# Altium PCB PCB1.PcbDoc (part 3 of 7)
Units mm, origin at the board's own origin, x right, y up, seen from the top; angles counter-clockwise.
Board outline 168 x 107.92 mm, 4 copper layers (Top Layer, POWER_LAYER, GND_LAYER, Bottom Layer), stack 1.182 mm thick; 507 components, 566 nets, 2495 pads, 1244 vias.
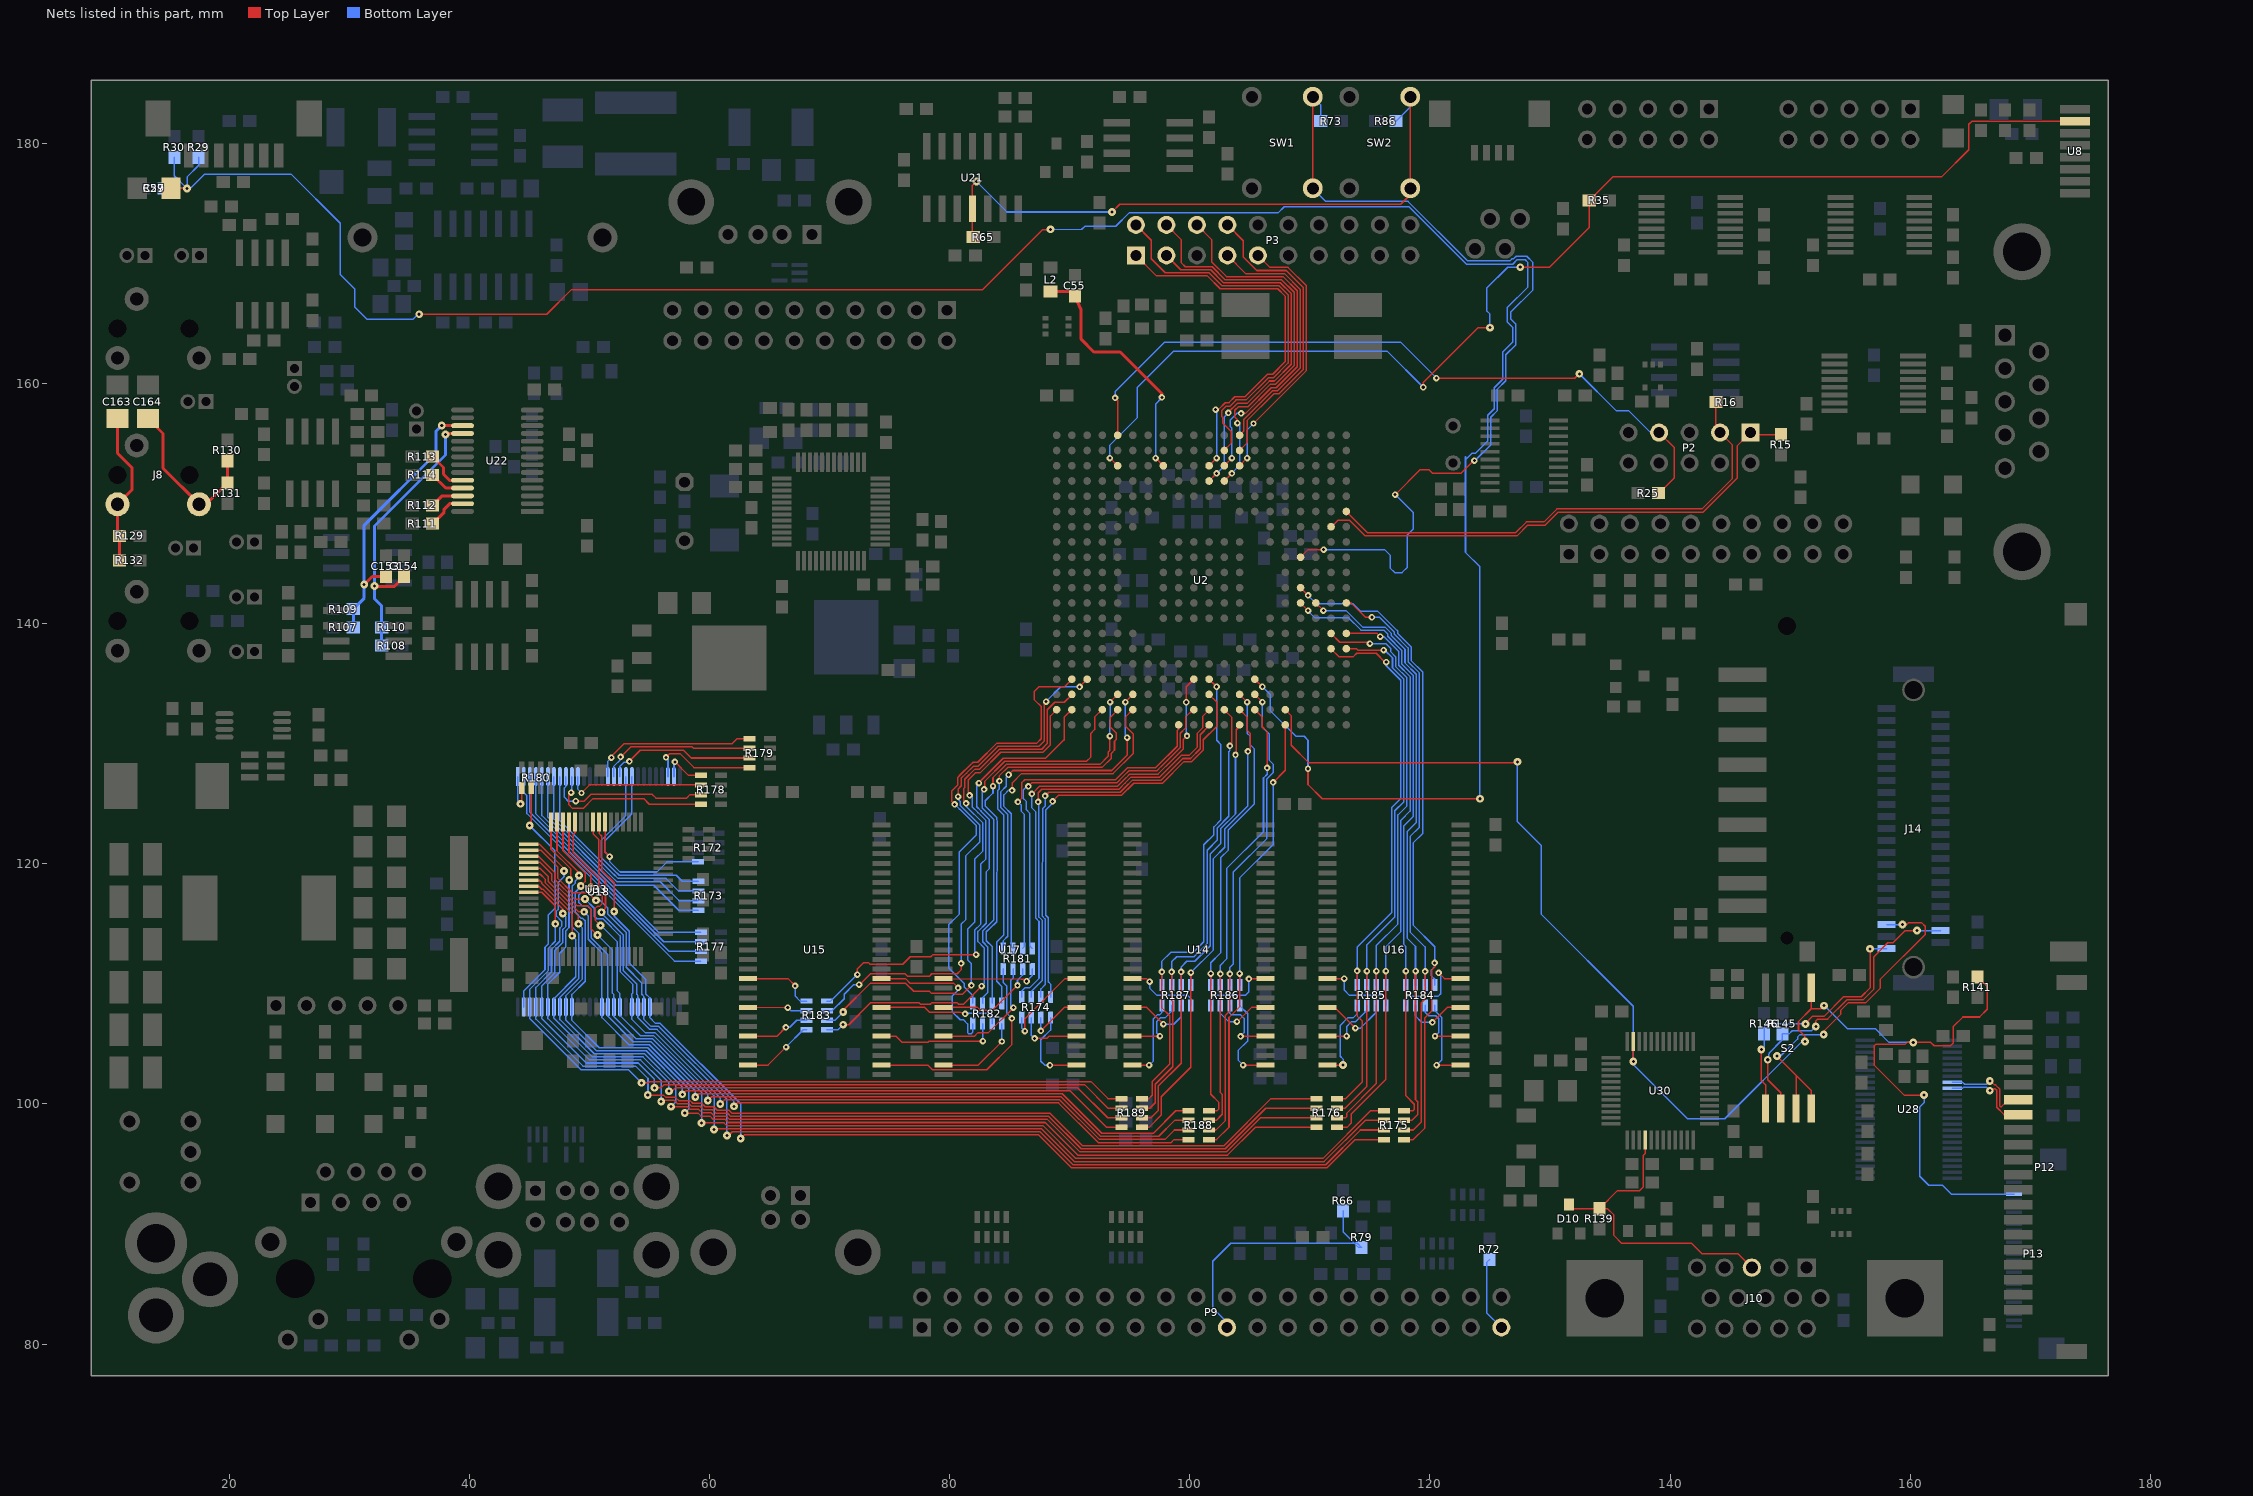
[diagram p5: the nets of this part, all layers, seen from the top]

## Via types
v1: diameter 0.54, hole 0.254, Top Layer to Bottom Layer, tented both sides, 504 vias
v2: diameter 0.65, hole 0.254, Top Layer to Bottom Layer, 387 vias
v3: diameter 0.65, hole 0.254, Top Layer to Bottom Layer, tented both sides, 325 vias
v4: diameter 0.54, hole 0.254, Top Layer to Bottom Layer, 25 vias
v5: diameter 1.27, hole 0.75, Top Layer to Bottom Layer, 2 vias
v6: diameter 0.65, hole 0.254, Top Layer to Bottom Layer, tented bottom, 1 vias

## Nets (pads, with @x,y where several pads share a name; then routed paths per layer and width w, separated by ;. In a path a pad name is that pad's centre, name@x,y a point inside that pad or via, vN(x,y) a via of type N, cw(c..) or ccw(c..) an arc to the next point about the centre after c; other vN are vias at no path point) (continued)
AA7: R172.5 U18.20 U33.39 | length 19.3
  Top Layer w0.127: U33.39@51.28,123.487 51.28,122.112 51.262,122.094 51.262,121.001 v1(51.662,120.601)
  Bottom Layer w0.127: U18.20@53.526,127.273 53.526,124.165 51.262,121.901 51.262,121.001 v1(51.662,120.601) 51.662,120.194 52.536,119.32 55.6,119.32 56.44,120.16 R172.5@59.04,120.16
AA8: R173.8 U18.19 | length 16.5
  Bottom Layer w0.127: 52.044,119.453 50.982,120.515 50.982,121.98 53.026,124.024 U18.19@53.026,127.273 ; 52.044,119.453 52.457,119.04 57.22,119.04 57.72,118.54 R173.8@59.06,118.54
AA9: R173.7 U18.8 | length 17.6
  Bottom Layer w0.127: U18.8@47.526,127.273 47.526,123.594 51.988,119.132 52.006,119.132 52.358,118.78 56.36,118.78 57.4,117.74 R173.7@59.06,117.74
AA10: R173.6 U18.7 | length 18.4
  Bottom Layer w0.127: U18.7@47.026,127.273 47.026,123.735 52.146,118.614 52.164,118.614 52.278,118.5 55.88,118.5 57.44,116.94 R173.6@59.06,116.94
AA11: R173.5 U18.6 | length 19.1
  Bottom Layer w0.127: U18.6@46.526,127.273 46.526,123.876 52.182,118.22 55.34,118.22 57.42,116.14 R173.5@59.06,116.14
AA12: R177.8 U18.5 | length 20.5
  Bottom Layer w0.127: U18.5@46.026,127.273 46.026,124.017 55.362,114.68 ; 55.362,114.68 55.742,114.3 R177.8@59.26,114.3
AA13: R177.7 U18.4 | length 21.3
  Bottom Layer w0.127: U18.4@45.526,127.273 45.526,124.157 55.002,114.68 ; 55.002,114.68 56.182,113.5 R177.7@59.26,113.5
AA14: R177.6 U18.3 | length 22
  Bottom Layer w0.127: U18.3@45.026,127.273 45.026,124.297 56.622,112.7 R177.6@59.26,112.7
AA15: R177.5 U18.2 | length 22.8
  Bottom Layer w0.127: U18.2@44.526,127.273 44.526,125.914 44.772,125.668 44.772,124.191 57.062,111.9 R177.5@59.26,111.9
AA16: R180.5 U18.1 | length 3.7
  Top Layer w0.127: v3(44.242,125.001) 44.336,125.095 R180.5@44.336,126.316
  Bottom Layer w0.127: U18.1@44.026,127.273 44.026,125.217 v3(44.242,125.001)
AA17: R180.6 U18.55 | length 20.3
  Top Layer w0.127: v3(45.002,123.181) 45.136,123.315 R180.6@45.136,126.316 ; 45.12,125.12 45.136,125.136
  Bottom Layer w0.127: U18.55@44.526,108.073 44.526,109.424 46.28,111.178 46.28,113.049 46.542,113.31 46.542,115.729 47.142,116.329 47.142,118.278 47.102,118.318 47.102,121.081 v3(45.002,123.181)
AA18: R179.7 U18.18 | length 12.5
  Top Layer w0.127: v1(53.302,128.541) 54.221,129.46 57.82,129.46 58.464,128.816 R179.7@63.324,128.816
  Bottom Layer w0.127: U18.18@52.526,127.273 52.526,128.126 52.881,128.481 53.242,128.481 v1(53.302,128.541)
AA19: R179.6 U18.17 | length 13
  Top Layer w0.127: v1(52.582,128.901) 53.421,129.74 58.54,129.74 58.664,129.616 R179.6@63.324,129.616
  Bottom Layer w0.127: U18.17@52.026,127.273 52.026,128.146 52.582,128.702 v1(52.582,128.901)
AA20: R179.5 U18.16 | length 13.9
  Top Layer w0.127: v1(51.802,128.841) 51.802,128.942 52.86,130 61.864,130 62.28,130.416 R179.5@63.324,130.416
  Bottom Layer w0.127: U18.16@51.526,127.273 51.526,128.565 v1(51.802,128.841)
AA21: R178.6 U18.11 | length 11.7
  Top Layer w0.127: v1(49.32,125.9) 49.988,126.568 R178.6@59.26,126.568
  Bottom Layer w0.127: U18.11@49.026,127.273 49.026,126.194 v1(49.32,125.9)
AA22: R178.8 U18.10 | length 14.1
  Top Layer w0.127: v1(48.46,125.94) 48.26,125.74 48.26,124.94 48.58,124.62 49.46,124.62 50.28,125.44 54.5,125.44 54.972,124.968 R178.8@59.26,124.968
  Bottom Layer w0.127: v1(48.46,125.94) 48.526,126.006 U18.10@48.526,127.273
AA23: R178.7 U18.9 | length 13.8
  Top Layer w0.127: v1(48.84,125.22) 49.54,125.22 50.1,125.78 55.22,125.78 55.52,125.48 58.08,125.48 58.368,125.768 R178.7@59.26,125.768
  Bottom Layer w0.127: U18.9@48.026,127.273 48.026,126.446 47.9,126.32 47.9,125.54 48.22,125.22 v1(48.84,125.22)
AA24: R179.8 U18.26 | length 9.2
  Top Layer w0.127: v1(56.36,128.86) 56.68,129.18 57.52,129.18 58.684,128.016 R179.8@63.324,128.016
  Bottom Layer w0.127: v1(56.36,128.86) 56.526,128.694 U18.26@56.526,127.273
AA25: R178.5 U18.27 | length 3.9
  Top Layer w0.127: v1(57.1,128.5) 58.232,127.368 R178.5@59.26,127.368
  Bottom Layer w0.127: U18.27@57.026,127.273 57.026,128.426 v1(57.1,128.5)
ADC_VDD: C55.2 L2.2 U2.H18 | length 21
  Top Layer w0.127: C55.2@90.066,167.656 C55.2@90.424,167.298 ; v1(97.15,153.8) 97.152,153.8 U2.H18@97.79,153.162
  Top Layer w0.2: v4(97.66,158.86) 97.66,159.18
  Top Layer w0.25: L2.2@88.392,167.656 C55.2@90.066,167.656 ; C55.2@90.424,167.298 90.94,166.16 90.94,163.7 91.996,162.644 94.196,162.644 97.66,159.18
  Bottom Layer w0.127: v1(97.15,153.8) 97.15,158.31 97.66,158.82 v4(97.66,158.86)
AINA: C153.2 R107.1 R109.1 U22.17 | length 23.7
  Top Layer w0.25: v2(31.22,143.26) 31.89,143.93 C153.2@33.02,143.93 ; v2(37.68,156.52) 37.698,156.502 U22.17@39.412,156.502
  Bottom Layer w0.25: R107.1@30.314,139.7 R109.1@30.314,141.224 31.22,142.13 31.22,148.2 37.2,154.18 37.2,156.04 v2(37.68,156.52)
AINB: C154.1 R108.1 R110.1 U22.18 | length 24.6
  Top Layer w0.25: v2(32.08,143.14) 32.08,143.12 33.734,143.12 C154.1@34.544,143.93 ; v2(38,155.76) 38.092,155.852 U22.18@39.412,155.852
  Bottom Layer w0.25: R108.1@32.678,138.176 32.678,141.482 32.08,142.08 32.08,148.14 38,154.06 v2(38,155.76)
AOUTA+: R114.2 U22.25 | length 2.9
  Top Layer w0.25: R114.2@36.918,152.4 38.016,151.302 U22.25@39.412,151.302
AOUTA-: R113.2 U22.24 | length 3.6
  Top Layer w0.25: R113.2@36.918,153.924 37.82,153.022 37.82,152.46 38.328,151.952 U22.24@39.412,151.952
AOUTB+: R112.2 U22.26 | length 2.8
  Top Layer w0.25: R112.2@36.918,149.86 37.71,150.652 U22.26@39.412,150.652
AOUTB-: R111.2 U22.27 | length 3.3
  Top Layer w0.25: R111.2@36.918,148.336 37.88,149.298 37.88,149.54 38.342,150.002 U22.27@39.412,150.002
BLANK: P13.3 R141.1 S2.1 U2.T2 U30.11 | length 124.3
  Top Layer w0.127: U2.T2@107.95,132.842 107.95,132.83 108.46,132.32 108.46,129.84 108.48,129.84 109.887,128.433 121.02,128.42 127.2,128.42 v3(127.28,128.5) ; v2(136.942,103.542) U30.11@136.942,105.192 ; v3(151.24,105.2) 151.24,105.64 150.7,106.18 150.7,106.86 151.765,107.925 ; S2.1@151.765,109.673 151.765,107.925 ; v3(152.82,108.18) 152.565,107.925 151.765,107.925 ; v3(161.16,100.74) 159.5,100.74 157,103.24 157,104.82 157.14,104.96 159.58,104.96 159.74,105.12 161.72,105.12 162,104.84 163.36,104.84 163.6,105.08 163.6,106.44 164.4,107.24 165.78,107.24 166.42,107.88 166.42,109.766 R141.1@165.608,110.578
  Bottom Layer w0.127: v3(127.28,128.5) 127.28,123.528 129.254,121.554 129.254,115.826 136.942,108.138 136.942,103.278 141.46,98.76 144.56,98.76 151,105.2 v3(151.24,105.2) ; v3@152.86,108.18 154.786,106.254 157.106,106.254 158.24,105.12 v3(160.26,105.12) ; v3(161.16,100.74) 161.16,100.1 160.794,99.734 160.794,93.98 161.553,93.221 162.699,93.221 163.448,92.472 P13.3@168.656,92.472
BLUE: D10.3 J10.3 R139.2 U30.28 | length 26.8
  Top Layer w0.127: D10.3@131.572,91.624 131.922,91.274 134.786,91.274 135.32,90.74 135.32,89.04 135.96,88.4 141.78,88.4 142.66,87.52 145.652,87.52 J10.3@146.812,86.36 ; R139.2@134.112,91.274 135.618,92.78 137.471,92.78 137.559,92.868 137.568,92.868 137.757,93.057 137.757,95.677 137.942,95.862 U30.28@137.942,96.992
BOOT0: R73.2 SW1.1 SW1.4 U2.U12 | length 75.8
  Top Layer w0.127: U2.U12@109.22,145.542 109.22,145.55 109.85,146.18 v1(111.14,146.18) ; SW1.4@110.236,176.276 SW1.1@110.236,183.896 ; v1(117.1,150.76) 117.12,150.76 119.2,152.84 119.9,152.84 120.2,152.54 122.581,152.54 123.621,153.58 v1(123.7,153.58)
  Bottom Layer w0.127: SW1.4@110.236,176.276 111.327,175.185 118.175,175.185 123.14,170.22 126.663,170.22 126.863,170.42 126.98,170.42 127.18,170.62 128.06,170.62 128.58,170.1 128.58,167.8 126.72,165.94 126.72,165.4 127.14,164.98 127.14,163.22 126.32,162.4 126.32,160.24 125.625,159.545 125.625,157.765 125.06,157.2 125.06,154.9 123.74,153.58 v1(123.7,153.58) ; SW1.1@110.236,183.896 110.91,183.222 R73.2@110.91,181.864 ; v1(111.14,146.18) 116.22,146.18 116.68,145.72 116.68,144.64 117.06,144.26 117.68,144.26 118.12,144.7 118.12,147.42 118.62,147.92 118.62,149.24 v1(117.1,150.76)
BRIGHT: C59.2 R27.1 R29.2 R30.2 U2.P4 | length 209.9
  Top Layer w0.127: C59.2@15.116,176.276 16.444,176.276 v3(16.46,176.26) ; v3(35.8,165.78) 46.42,165.78 48.48,167.84 82.751,167.84 87.751,172.84 v3@88.36,172.84 ; U2.P4@105.41,135.382 106.04,134.752 v1(106.04,134.75) ; v1(109.84,127.92) 109.84,126.6 111.02,125.42 v3(124.16,125.42)
  Bottom Layer w0.127: R27.1@14.566,176.276 16.756,176.276 17.94,177.46 25.12,177.46 29.22,173.36 29.22,169.1 30.42,167.9 30.42,166.4 31.44,165.38 35.3,165.38 35.7,165.78 v3(35.8,165.78) ; R30.2@15.4,178.862 15.4,177.32 v3(16.46,176.26) 16.46,177.22 17.432,178.192 R29.2@17.432,178.862 ; v3@88.36,172.84 88.38,172.84 91,172.86 91.26,173.12 93.831,173.12 94.931,174.22 107.34,174.22 107.86,174.74 118.26,174.74 123.046,169.954 126.894,169.954 127.26,170.32 127.94,170.32 128.16,170.1 128.16,168.06 126.42,166.32 126.42,165.16 126.886,164.694 126.886,163.446 126.066,162.626 126.066,160.367 125.36,159.661 125.36,157.916 124.806,157.362 124.806,155.226 123.766,154.186 123.486,154.186 122.96,153.66 ; v1(106.04,134.75) 106.05,134.75 106.68,134.12 106.68,132.78 108.84,130.62 109.52,130.62 109.84,130.3 v1(109.84,127.92) ; 122.96,153.92 122.96,145.94 124.16,144.74 v3(124.16,125.42)
  other v3: 88.38,172.86
CLK0M: P12.14 U28.33 | length 7.4
  Top Layer w0.127: v3(166.64,101.1) 166.82,101.1 166.98,101.26 167.08,101.26 167.206,101.134 167.206,99.714 167.81,99.11 P12.14@169.013,99.11
  Bottom Layer w0.127: U28.33@163.504,101.31 164.37,101.31 164.44,101.38 166.36,101.38 v3(166.64,101.1)
CLK0P: P12.15 U28.32 | length 7.7
  Top Layer w0.127: v3(166.64,101.92) 166.68,101.92 167.02,101.58 167.12,101.58 167.46,101.24 167.46,99.819 167.499,99.78 167.62,99.78 167.878,100.038 168.2,100.36 P12.15@169.013,100.36
  Bottom Layer w0.127: U28.32@163.504,101.81 164.37,101.81 164.54,101.64 166.36,101.64 v3(166.64,101.92)
COL0: P3.9 U2.N18 | length 22.4
  Top Layer w0.127: U2.N18@104.14,153.162 104.14,153.17 v1(104.77,153.8) ; v1(105.3,156.68) 109.708,161.087 109.708,168.152 108.18,169.68 106.672,169.68 P3.9@105.664,170.688
  Bottom Layer w0.127: v1(104.77,153.8) 104.77,156.15 v1(105.3,156.68)
COL1: P3.8 U2.N19 | length 25.3
  Top Layer w0.127: P3.8@103.124,173.228 104.44,171.912 104.44,170.56 105.574,169.426 108.02,169.426 109.454,167.992 109.454,161.192 107.402,159.14 106.98,159.14 104.76,156.92 104.76,155.06 104.14,154.44 U2.N19@104.14,154.432
COL2: P3.7 U2.N20 | length 21.7
  Top Layer w0.127: P3.7@103.124,170.688 104.64,169.172 107.88,169.172 109.2,167.852 109.2,161.297 107.307,159.404 106.884,159.404 104.506,157.026 104.506,156.086 104.14,155.72 U2.N20@104.14,155.702
COL3: P3.6 U2.M18 | length 29.6
  Top Layer w0.127: P3.6@100.584,173.228 101.84,171.972 101.84,170.12 103.042,168.918 107.76,168.918 108.946,167.732 108.946,161.402 107.204,159.66 106.781,159.66 104.641,157.52 v1(104.26,157.52) ; U2.M18@102.87,153.162 102.87,153.17 v1(103.5,153.8)
  Bottom Layer w0.127: v1(103.5,153.8) 103.5,156.28 103.36,156.42 103.36,156.98 103.9,157.52 v1(104.26,157.52)
COL4: P3.4 U2.M17 | length 33.3
  Top Layer w0.127: P3.4@98.044,173.228 99.3,171.972 99.3,170.06 99.621,169.739 101.861,169.739 102.936,168.664 107.64,168.664 108.692,167.612 108.692,161.508 107.149,159.965 106.727,159.965 104.842,158.08 104.04,158.08 103.74,157.78 103.74,157.22 103.96,157 v1(103.96,156.72) ; U2.M17@102.87,151.892 102.87,151.9 v1(103.5,152.53)
  Bottom Layer w0.127: v1(103.5,152.53) 103.5,152.56 104.16,153.22 104.16,156.56 v1(103.96,156.72)
COL5: P3.3 U2.L17 | length 30.9
  Top Layer w0.127: P3.3@98.044,170.688 99.247,169.485 101.734,169.485 102.809,168.41 107.534,168.41 108.438,167.506 108.438,161.613 107.045,160.22 106.622,160.22 104.76,158.358 103.938,158.358 103.2,157.62 v1(103.2,157.56) ; U2.L17@101.6,151.892 101.6,151.9 v1(102.23,152.53)
  Bottom Layer w0.127: v1(102.23,152.53) 102.25,152.53 102.88,153.16 102.88,157.24 v1(103.2,157.56)
COL6: P3.2 U2.M19 | length 32.7
  Top Layer w0.127: P3.2@95.504,173.228 96.78,171.952 96.78,170.4 97.949,169.231 101.594,169.231 102.669,168.156 107.429,168.156 108.184,167.401 108.184,161.718 106.943,160.477 106.52,160.477 104.683,158.64 103.841,158.64 ; U2.M19@102.87,154.432 102.87,154.47 103.46,155.06 103.46,156 102.74,156.72 102.74,157.18 102.66,157.26 102.66,157.76 103.02,158.12 103.341,158.12 103.841,158.62
COL7: P3.1 U2.L18 | length 31.7
  Top Layer w0.127: P3.1@95.504,170.688 97.215,168.977 101.463,168.977 102.538,167.902 107.324,167.902 107.93,167.296 107.93,161.823 106.895,160.788 106.472,160.788 104.59,158.906 103.74,158.906 103.264,158.43 103.264,158.41 102.951,158.41 102.381,157.84 v1(102.14,157.84) ; U2.L18@101.6,153.162 101.6,153.17 v1(102.23,153.8)
  Bottom Layer w0.127: v1(102.14,157.84) 102.23,157.75 v1(102.23,153.8)
D0: R175.1 R184.8 U2.U10 | length 57.4
  Top Layer w0.127: U2.U10@109.22,143.002 v1@109.85,142.372 ; R175.1@117.856,97.028 118.608,97.028 119.58,98 119.58,107.18 120.14,107.74 120.14,111.16 120.396,111.416 v1(120.396,111.74)
  Bottom Layer w0.127: v1@109.85,142.35 110.54,141.66 113.6,141.66 114.2,141.06 115.64,141.06 117.26,139.44 117.3,139.399 117.3,139.217 118.431,138.086 118.431,136.943 119.38,135.994 119.38,122.51 118.598,121.728 118.598,114.898 120.396,113.1 120.396,111.44 120.12,111.164 120.12,110.66 120.396,110.384 R184.8@120.396,109.904
  other v1: 109.85,142.37
D1: R175.2 R184.7 U2.Y9 | length 50.5
  Top Layer w0.127: U2.Y9@113.03,141.732 113.428,141.732 114.62,140.54 v1(115.16,140.54) ; R175.2@117.856,97.828 118.608,97.828 119.26,98.48 119.26,108.38 119.596,108.716 v1(119.596,111.04)
  Bottom Layer w0.127: v1(115.16,140.54) 115.8,140.54 117.02,139.32 117.02,139.138 118.177,137.98 118.177,136.838 119.12,135.895 119.12,123.05 118.344,122.274 118.344,114.332 119.596,113.08 R184.7@119.596,109.904
D2: R175.3 R184.6 U2.V9 | length 51.5
  Top Layer w0.127: U2.V9@110.49,141.732 111.12,141.102 v1(111.12,141.1) ; R175.3@117.856,98.628 118.488,98.628 118.98,99.12 118.98,100.18 118.796,100.364 v1(118.796,111.06)
  Bottom Layer w0.127: v1(111.12,141.1) 113.013,141.1 114.386,139.727 116.253,139.727 116.76,139.22 116.76,139.038 117.92,137.878 117.92,136.736 118.86,135.796 118.86,123.444 118.09,122.674 118.09,113.826 118.796,113.12 R184.6@118.796,109.904
D3: R175.4 R184.5 U2.U9 | length 51.6
  Top Layer w0.127: U2.U9@109.22,141.732 109.85,141.102 v1(109.85,141.1) ; R175.4@117.856,99.428 118.588,99.428 118.7,99.54 118.7,99.98 117.996,100.684 v1(117.996,111.06)
  Bottom Layer w0.127: v1(109.85,141.1) 109.85,141.05 110.42,140.48 113.24,140.48 114.247,139.473 116.147,139.473 116.48,139.14 116.48,138.959 117.658,137.781 117.658,136.639 118.6,135.697 118.6,123.938 117.836,123.174 117.836,113.26 117.996,113.1 R184.5@117.996,109.904
D4: R176.1 R185.8 U2.Y7 | length 49.2
  Top Layer w0.127: R176.1@112.268,98.044 113.084,98.044 113.44,98.4 113.44,99.16 116.332,102.052 v1(116.332,111.06) ; U2.Y7@113.03,139.192 115.588,139.192 v1(115.86,138.92)
  Bottom Layer w0.127: v1(115.86,138.92) 116.16,138.92 117.4,137.68 117.4,136.538 118.34,135.598 118.34,124.392 117.582,123.634 117.582,114.362 116.332,113.112 R185.8@116.332,109.904
D5: R176.2 R185.7 U2.W7 | length 49.1
  Top Layer w0.127: U2.W7@111.772,139.192 U2.W7@111.76,139.192 111.76,139.18 112.48,138.46 114.88,138.46 v1(115,138.34) ; R176.2@112.268,98.844 112.964,98.844 113.08,98.96 113.08,99.24 115.532,101.692 v1(115.532,111.06)
  Bottom Layer w0.127: v1(115,138.34) 116.34,138.34 116.72,137.96 116.72,137.679 117.14,137.259 117.14,136.438 118.08,135.498 118.08,124.826 117.328,124.074 117.328,114.988 115.532,113.192 R185.7@115.532,109.904
D6: R176.3 R185.6 U2.Y6 | length 45.9
  Top Layer w0.127: R176.3@112.268,99.644 112.924,99.644 114.74,101.46 v1(114.74,111.06) ; U2.Y6@113.03,137.922 113.878,137.922 114.006,137.794 116.134,137.794 v1(116.14,137.8)
  Bottom Layer w0.127: R185.6@114.732,109.904 114.732,113.232 117.074,115.574 117.074,124.414 117.82,125.16 117.82,135.399 116.88,136.339 116.88,137.16 116.24,137.8 v1(116.14,137.8)
D7: R176.4 R185.5 U2.W6 | length 46.3
  Top Layer w0.127: U2.W6@111.762,137.922 U2.W6@111.76,137.922 111.76,137.9 112.4,137.26 113.62,137.26 113.9,137.54 115.52,137.54 116.26,136.8 v1(116.36,136.8) ; R176.4@112.268,100.444 112.984,100.444 114.34,101.8 114.34,106.92 113.932,107.328 v1(113.932,111.08)
  Bottom Layer w0.127: R185.5@113.932,109.904 113.932,113.052 116.82,115.94 116.82,124.7 117.56,125.44 117.56,135.3 116.36,136.5 v1(116.36,136.8)
D8: R186.8 R188.1 U2.T1 | length 38.5
  Top Layer w0.127: R188.1@101.6,97.028 102.228,97.028 103.26,98.06 103.26,107.2 104.14,108.08 v1(104.14,110.86) ; v1(106.94,126.78) 107.95,127.79 U2.T1@107.95,131.572
  Bottom Layer w0.127: R186.8@104.14,109.904 104.14,118.82 106.94,121.62 v1(106.94,126.78)
D9: R186.7 R188.2 U2.P3 | length 40.4
  Top Layer w0.127: R188.2@101.6,97.828 102.168,97.828 102.96,98.62 102.96,107.38 103.34,107.76 v1(103.34,110.84) ; U2.P3@105.41,134.112 105.41,134.11 v1(106.04,133.48)
  Bottom Layer w0.127: R186.7@103.34,109.904 103.34,111.38 103.6,111.64 103.6,119.3 106.42,122.12 106.42,127.08 106.96,127.62 106.96,128.28 106.627,128.613 106.627,130.793 106.04,131.38 v1(106.04,133.48)
D10: R186.6 R188.3 U2.P2 | length 38
  Top Layer w0.127: R188.3@101.6,98.628 102.188,98.628 102.7,99.14 102.7,100.78 102.54,100.94 v1(102.54,110.84) ; U2.P2@105.41,132.842 105.41,132.83 106.02,132.22 106.02,131.42 106.426,131.014 v1@106.426,128.014
  Bottom Layer w0.127: R186.6@102.54,109.904 102.54,111.56 103.06,112.08 103.06,119.6 106.134,122.674 106.134,127.153 106.44,127.459 v1(106.44,128)
D11: R186.5 R188.4 U2.N3 | length 38.7
  Top Layer w0.127: R188.4@101.6,99.428 102.268,99.428 102.42,99.58 102.42,100.12 101.74,100.8 v1(101.74,110.86) ; U2.N3@104.14,134.112 104.77,133.482 v1(104.77,133.48)
  Bottom Layer w0.127: R186.5@101.74,109.904 101.74,111.76 102.56,112.58 102.56,120.5 103.209,121.149 103.209,122.848 105.372,125.01 105.372,129.568 105.04,129.9 105.04,130.6 104.77,130.87 v1(104.77,133.48)
D12: R187.8 R189.1 U2.N2 | length 40.3
  Top Layer w0.127: R189.1@96.012,98.044 96.584,98.044 97.622,99.082 97.622,100.602 100.076,103.056 v1(100.076,110.936) ; U2.N2@104.14,132.842 104.158,132.842 104.76,132.24 104.76,131.12 105.02,130.86 105.02,129.54 v1(104.84,129.36)
  Bottom Layer w0.127: R187.8@100.076,109.904 v1(100.076,110.936) 101.96,112.82 101.96,120.44 102.9,121.38 102.9,122.898 103.891,123.889 104.84,124.838 v1(104.84,129.36)
D13: R187.7 R189.2 U2.N1 | length 38
  Top Layer w0.127: R189.2@96.012,98.844 96.764,98.844 97.368,99.448 97.368,101.488 99.276,103.396 v1(99.276,111) ; v1(103.8,129.08) 103.86,129.14 103.86,131.16 104.14,131.44 U2.N1@104.14,131.572
  Bottom Layer w0.127: R187.7@99.276,109.904 99.276,111.416 99.74,111.88 100.4,111.88 101.7,113.18 101.7,120.82 102.576,121.696 102.576,122.933 103.8,124.157 v1(103.8,129.08)
D14: R187.6 R189.3 U2.M2 | length 39
  Top Layer w0.127: R189.3@96.012,99.644 96.664,99.644 97.114,100.094 97.114,101.634 98.58,103.1 98.58,108.54 98.476,108.644 v1(98.476,111) ; U2.M2@102.87,132.842 102.87,132.81 103.5,132.18 103.5,129.98 v1(103.34,129.82)
  Bottom Layer w0.127: R187.6@98.476,109.904 98.476,111.836 98.9,112.26 100.34,112.26 101.44,113.36 101.44,121.14 102.277,121.977 102.277,122.993 103.24,123.956 103.24,129.34 103.34,129.44 v1(103.34,129.82)
D15: R187.5 R189.4 U2.L4 | length 41.1
  Top Layer w0.127: R189.4@96.012,100.444 96.584,100.444 96.86,100.72 96.86,101.86 98.32,103.32 98.32,107.34 97.676,107.984 v1(97.676,111) ; U2.L4@101.6,135.382 v1@102.23,134.752
  Bottom Layer w0.127: R187.5@97.676,109.904 97.676,111.896 98.42,112.64 100.3,112.64 101.16,113.5 101.16,121.58 102.003,122.423 102.003,123.078 102.58,123.655 102.58,129.94 102.23,130.29 v1(102.23,134.75)
D16: R174.8 U2.L3 | length 36.4
  Top Layer w0.127: v1(88.56,125.2) 89.064,125.704 94.304,125.704 94.815,126.215 ; 94.816,126.215 95.319,126.718 97.718,126.718 99.521,128.521 100.161,128.521 101.12,129.48 101.12,130.33 102.23,131.44 102.23,133.482 U2.L3@101.6,134.112
  Bottom Layer w0.127: R174.8@88.392,108.888 88.392,109.988 88.2,110.18 88.2,115.514 87.994,115.72 87.994,124.474 88.56,125.04 v1(88.56,125.2)
D17: R174.6 U2.L2 | length 36
  Top Layer w0.127: v1(87.36,125.16) 87.36,125.92 87.66,126.22 94.1,126.22 94.606,126.726 95.106,127.226 97.486,127.226 99.289,129.029 99.929,129.029 100.6,129.7 100.6,130.86 101.06,131.32 101.06,132.28 U2.L2@101.6,132.82 ; U2.L2@101.522,132.842 U2.L2@101.6,132.842 U2.L2@101.6,132.8
  Bottom Layer w0.127: R174.6@86.792,108.888 86.792,109.392 86.812,109.392 87.686,110.266 87.686,115.31 87.426,115.569 87.426,125.094 v1(87.36,125.16)
D18: R174.7 U2.L1 | length 33.9
  Top Layer w0.127: v1(87.94,125.66) 88.24,125.96 94.2,125.96 94.617,126.377 ; 94.618,126.377 95.213,126.972 97.612,126.972 99.415,128.775 100.055,128.775 100.86,129.58 100.86,130.761 101.6,131.501 U2.L1@101.6,131.572
  Bottom Layer w0.127: R174.7@87.592,108.888 87.592,109.572 87.94,109.92 87.94,115.415 87.7,115.655 ; 87.703,115.651 87.703,115.655 87.74,124.6 87.94,124.8 v1(87.94,125.66)
D19: R174.5 U2.K4 | length 38.4
  Top Layer w0.127: v1(86.84,125.82) 87.5,126.48 94,126.48 94.688,127.168 ; 94.671,127.152 94.998,127.48 97.353,127.48 98.016,128.143 98.031,128.143 99.448,129.56 99.448,130.348 v1(99.76,130.66) ; v1(99.7,133.46) 99.7,134.752 U2.K4@100.33,135.382
  Bottom Layer w0.127: R174.5@85.992,108.888 85.992,109.412 86.24,109.66 86.64,109.66 87.432,110.452 87.432,115.204 87.172,115.464 87.172,124.328 86.84,124.66 v1(86.84,125.82) ; v1(99.7,133.46) 99.7,130.72 v1(99.76,130.66)
D20: R181.8 U2.K2 | length 31.7
  Top Layer w0.127: v1(86.54,126.46) 86.82,126.74 93.9,126.74 94.48,127.32 94.899,127.74 97.239,127.74 97.601,128.102 97.616,128.102 99.194,129.68 99.194,130.874 99.64,131.32 99.64,132.22 100.25,132.83 100.33,132.83 U2.K2@100.33,132.842
  Bottom Layer w0.127: v1(86.54,126.46) 86.44,126.46 86.1,126.12 86.1,125.468 86.38,125.188 86.38,124.5 86.68,124.2 86.68,113.14 R181.8@86.868,112.952
D21: R181.7 U2.J1 | length 30.2
  Top Layer w0.127: v1(85.68,125.16) 86.014,125.494 86.014,126.774 86.24,127 93.8,127 94.8,128 97.129,128 97.23,128.101 97.241,128.101 98.94,129.8 98.94,131.1 99.06,131.22 U2.J1@99.06,131.572
  Bottom Layer w0.127: v1(85.68,125.16) 85.94,124.9 85.94,124.4 86.22,124.12 86.22,113.104 R181.7@86.068,112.952
D22: R181.6 U2.F2 | length 29.9
  Top Layer w0.127: v1(85.2,126.12) 85.2,126.739 85.98,127.519 93.6,127.52 95.3,129.22 95.3,130.8 94.64,131.46 94.64,132.24 95.242,132.842 U2.F2@95.25,132.842 U2.F2@95.25,132.81
  Bottom Layer w0.127: v1(85.2,126.12) 84.9,126.12 84.514,125.734 84.514,124.785 85.12,124.179 85.12,113.1 R181.6@85.268,112.952
D23: R182.8 U2.E2 | length 34.2
  Top Layer w0.127: v1(84.14,126.9) 84.14,127.348 84.82,128.028 92.688,128.028 93.46,128.8 93.46,129.22 93.72,129.48 93.72,130.219 93.86,130.359 93.86,130.9 93.36,131.4 93.36,132.2 93.98,132.82 U2.E2@93.98,132.842
  Bottom Layer w0.127: v1(84.14,126.9) 84.14,126.258 84,126.118 84,124.56 84.5,124.06 84.5,114.08 83.909,113.489 83.909,110.211 84.328,109.792 R182.8@84.328,108.38
D24: R181.5 U2.F3 | length 31
  Top Layer w0.127: v1(84.9,127.42) 85.254,127.774 93.494,127.774 94.78,129.06 v1(94.78,130.52) ; v1(94.62,133.474) 94.62,133.482 U2.F3@95.25,134.112
  Bottom Layer w0.127: R181.5@84.468,112.952 84.468,113.608 84.82,113.96 84.82,124.12 84.26,124.68 84.26,126.019 84.7,126.459 84.7,127.22 v1(84.9,127.42) ; v1(94.62,133.474) 94.62,130.68 v1(94.78,130.52)
D25: R182.6 U2.D2 | length 33.8
  Top Layer w0.127: v1(82.86,126.2) 82.9,126.24 82.9,126.856 84.58,128.536 91.396,128.536 91.76,128.9 91.76,130.88 92.06,131.18 92.06,132.22 92.67,132.83 92.71,132.83 U2.D2@92.71,132.842
  Bottom Layer w0.127: R182.6@82.739,108.391 R182.6@82.728,108.38 82.728,108.848 83.18,109.3 83.18,113.059 82.739,113.5 82.739,114.399 83.666,115.326 83.666,123.694 82.7,124.66 82.7,126.04 v1(82.86,126.2)
D26: R182.7 U2.E3 | length 35.8
  Top Layer w0.127: v1(83.6,126.48) 83.6,127.182 84.7,128.282 92.502,128.282 93.2,128.98 93.2,129.319 93.34,129.459 v1(93.34,130.64) ; v1@93.35,133.482 U2.E3@93.98,134.112
  Bottom Layer w0.127: R182.7@83.528,108.38 83.528,113.112 83.041,113.599 83.041,114.341 83.338,114.638 83.92,115.18 83.94,123.5 83.92,123.74 83.92,123.86 82.96,124.82 82.96,125.26 83.6,125.9 v1(83.6,126.48) ; v1(93.34,130.64) v1(93.35,133.474)
D27: R182.5 U2.B4 | length 37.7
  Top Layer w0.127: v1(80.4,124.96) 80.18,125.18 80.18,126.08 80.68,126.58 80.68,127.219 80.833,127.372 81.74,128.28 81.762,128.28 81.947,128.465 82.339,128.465 83.934,130.06 87.26,130.06 87.618,130.418 87.618,133.102 87.02,133.7 87.02,134.34 87.44,134.76 89.56,134.76 90.17,135.37 U2.B4@90.17,135.382
  Bottom Layer w0.127: v1(80.4,124.96) 80.8,124.56 80.821,124.56 82.218,123.163 82.218,122.422 80.8,121.004 80.8,115.82 79.896,114.916 79.896,111.344 81.211,110.029 81.211,109.729 81.928,109.012 R182.5@81.928,108.38
D28: R183.5 U2.A2 | length 41.2
  Top Layer w0.127: v1(72.3,110.78) 72.3,111.24 72.8,111.74 73.26,111.74 73.36,111.64 76.08,111.64 76.7,112.26 78.42,112.26 78.6,112.44 v1(82.2,112.44) ; v1(81.66,125.7) 81.52,125.96 81.52,126.96 82.16,127.6 82.552,127.6 84.25,129.298 87.76,129.298 88.3,129.838 88.38,129.918 88.38,132.322 U2.A2@88.9,132.842 U2.A2@88.9,132.84
  Bottom Layer w0.127: R183.5@69.772,108.572 70.092,108.572 v1(72.3,110.78) ; v1(81.66,125.7) 81.86,125.62 81.86,124.761 82.349,124.272 83.011,123.609 83.011,120.411 82.599,119.999 82.599,114.999 82.08,114.48 82.08,112.56 v1(82.2,112.44)
D29: R183.6 U2.C4 | length 46.2
  Top Layer w0.127: v1(72.44,109.94) 72.5,109.94 73.4,110.84 76.28,110.84 76.5,110.62 78.28,110.62 78.5,110.84 80.62,110.84 80.94,111.16 v1(80.94,111.7) ; v1(80.7,125.6) 80.7,126.241 80.96,126.501 80.96,127.14 81.381,127.561 81.403,127.561 81.969,128.127 82.36,128.127 84.039,129.806 87.446,129.806 87.786,130.146 87.792,130.146 87.872,130.226 87.872,133.372 v1(88.02,133.52) ; v1(90.81,134.744) 90.81,134.752 U2.C4@91.44,135.382
  Bottom Layer w0.127: R183.6@69.772,107.772 70.212,107.772 71.2,108.76 71.2,109.14 72,109.94 v1(72.44,109.94) ; v1(80.7,125.6) 80.7,125.38 80.88,125.2 80.88,124.86 82.476,123.264 82.476,121.806 81.32,120.65 81.34,115.62 81.34,115.36 80.94,114.96 v1(80.94,111.7) ; v1(88.02,133.52) 89.244,134.744 v1(90.81,134.744)
D30: R183.7 U2.B3 | length 46.1
  Top Layer w0.127: v3(71.12,107.66) 71.12,107.8 73.36,110.04 76.341,110.04 77.001,109.38 78.3,109.38 78.442,109.238 80.403,109.238 80.522,109.12 81.04,109.12 v1(81.8,109.88) ; v1(81.36,125.04) 81.18,125.22 81.18,126.3 81.24,126.36 81.24,127.04 82.067,127.866 82.458,127.866 84.144,129.552 87.652,129.552 88.04,129.94 88.042,129.94 88.126,130.024 88.126,132.834 88.752,133.46 89.54,133.46 90.17,134.09 U2.B3@90.17,134.112
  Bottom Layer w0.127: R183.7@69.772,106.972 70.432,106.972 v3(71.12,107.66) ; v1(81.36,125.04) 81.36,124.8 82.756,123.404 82.756,121.072 82.06,120.376 ; v1(81.8,109.88) 81.8,111.68 81.496,111.984 81.496,114.576 82.06,115.14 82.06,120.38
D31: R183.8 U2.B2 | length 44.2
  Top Layer w0.127: v3(71.12,106.6) 71.58,106.6 73.42,108.44 77.42,108.44 77.566,108.294 78.374,108.294 78.52,108.44 80.6,108.44 80.746,108.294 81.134,108.294 v1(82.66,109.82) ; v1@82.413,126.743 82.4,126.73 82.401,126.728 v1(82.42,126.72) ; v1@82.42,126.735 v1@82.427,126.743 ; v1@82.42,126.75 84.46,128.79 87.97,128.79 89.48,130.3 89.54,130.3 89.54,132.22 90.162,132.842 U2.B2@90.17,132.842
  Bottom Layer w0.127: R183.8@69.772,106.172 70.692,106.172 v3(71.12,106.6) ; v1(82.42,126.72) 82.24,126.5 82.24,124.761 82.6,124.401 82.6,124.38 83.269,123.711 83.269,119.577 83.02,119.328 83.02,118.12 83.033,118.107 83.033,115.052 82.343,114.362 82.343,113.52 82.86,113.003 82.86,110.02 v1(82.66,109.82)
D_DASPN: P9.39 R72.2 | length 6.3
  Bottom Layer w0.127: R72.2@124.968,87.034 124.72,86.786 124.72,82.612 P9.39@125.948,81.384
D_DMARQN: P9.21 R66.2 R79.2 | length 23
  Bottom Layer w0.127: P9.21@103.088,81.384 103.088,81.812 101.9,83 101.9,86.9 103.4,88.4 113.95,88.4 R79.2@114.3,88.05 114.05,88.05 112.776,89.324 R66.2@112.776,91.098
DD16: R174.1 U17.2 | length 7.1
  Top Layer w0.127: v1(88.34,103.22) 90.538,103.22 U17.2@90.558,103.24
  Bottom Layer w0.127: v1(88.34,103.22) 87.92,103.22 87.58,103.56 87.58,105.34 88.392,106.152 R174.1@88.392,107.188
DD17: R174.3 U17.5 | length 5.4
  Top Layer w0.127: v1(87.06,105.46) 88.08,105.46 88.26,105.64 U17.5@90.558,105.64
  Bottom Layer w0.127: R174.3@86.792,107.188 86.792,105.728 v1(87.06,105.46)
DD18: R174.2 U17.8 | length 5.1
  Top Layer w0.127: v1(87.592,106.092) 89.54,108.04 U17.8@90.558,108.04
  Bottom Layer w0.127: v1@87.46,105.96 v1(87.592,106.092) R174.2@87.592,107.188
DD19: R174.4 U17.11 | length 8
  Top Layer w0.127: v1(86.26,106.06) 86.26,107.1 89.6,110.44 U17.11@90.558,110.44
  Bottom Layer w0.127: R174.4@85.992,107.188 85.992,106.328 v1(86.26,106.06)
DD20: R181.1 U17.44 | length 8.2
  Top Layer w0.127: U17.44@79.458,110.44 85.94,110.4 86.22,110.4 v1(86.4,110.22)
  Bottom Layer w0.127: v1(86.4,110.22) 86.868,110.688 R181.1@86.868,111.252
DD21: R181.2 U17.47 | length 8.7
  Top Layer w0.127: U17.47@79.458,108.04 82.3,108.04 82.54,107.8 83.56,107.8 v1(85.64,109.88)
  Bottom Layer w0.127: v1(85.64,109.88) 85.64,110.3 86.068,110.728 R181.2@86.068,111.252
DD22: R181.3 U17.50 | length 10.2
  Top Layer w0.127: U17.50@79.458,105.64 82.06,105.64 82.36,105.94 83.22,105.94 v1(85.3,108.02)
  Bottom Layer w0.127: R181.3@85.268,111.252 85.268,110.488 85.08,110.3 85.08,108.18 v1(85.3,108.02)
DD23: R182.1 U17.53 | length 7.2
  Top Layer w0.127: U17.53@79.458,103.24 82.38,103.24 v1(84.34,105.2)
  Bottom Layer w0.127: R182.1@84.328,106.68 84.328,105.212 v1(84.34,105.2)
DD24: R181.4 U15.2 | length 18.5
  Top Layer w0.127: U15.2@74.302,103.24 78.16,103.24 78.56,102.84 83.08,102.84 85.18,104.94 v1(85.18,107.12)
  Bottom Layer w0.127: R181.4@84.468,111.252 84.468,110.1 84.76,109.808 84.76,107.54 v1(85.18,107.12)
DD25: R182.3 U15.5 | length 10.2
  Top Layer w0.127: U15.5@74.302,105.64 75.52,105.64 76.02,105.14 78.18,105.14 78.28,105.24 v1(82.76,105.24)
  Bottom Layer w0.127: R182.3@82.728,106.68 82.728,105.272 v1(82.76,105.24)
DD26: R182.2 U15.8 | length 10.4
  Top Layer w0.127: U15.8@74.302,108.04 77.92,108.04 78.32,107.64 80.84,107.64 v1(81.28,107.5)
  Bottom Layer w0.127: v1(81.28,107.5) 81.18,107.54 83.38,107.54 83.528,107.392 R182.2@83.528,106.68
DD27: R182.4 U15.11 | length 12.6
  Top Layer w0.127: U15.11@74.302,110.44 76.3,110.44 76.7,110.04 80.34,110.04 80.64,109.74 v1(80.7,109.66)
  Bottom Layer w0.127: v1(80.7,109.66) 80.7,109.48 80.213,108.993 80.213,107.667 80.875,107.005 81.135,107.005 81.48,106.66 81.48,105.94 81.58,105.84 81.78,105.84 81.928,105.988 R182.4@81.928,106.68
DD28: R183.4 U15.44 | length 6.1
  Top Layer w0.127: U15.44@63.202,110.44 66.52,110.44 v1(67.12,109.84)
  Bottom Layer w0.127: v1(67.12,109.84) 67.12,108.98 67.528,108.572 R183.4@68.072,108.572
DD29: R183.3 U15.47 | length 5
  Top Layer w0.127: U15.47@63.202,108.04 v1(66.5,108.02)
  Bottom Layer w0.127: v1(66.5,108.02) 66.748,107.772 R183.3@68.072,107.772
DD30: R183.2 U15.50 | length 5.4
  Top Layer w0.127: U15.50@63.202,105.64 65.6,105.64 v1(66.34,106.38)
  Bottom Layer w0.127: v1(66.34,106.38) 66.66,106.38 67.252,106.972 R183.2@68.072,106.972
DD31: R183.1 U15.53 | length 6.1
  Top Layer w0.127: U15.53@63.202,103.24 64.86,103.24 v1(66.36,104.74)
  Bottom Layer w0.127: v1(66.36,104.74) 67.792,106.172 R183.1@68.072,106.172
DIRECTSWITCH: R65.1 R86.1 SW2.1 SW2.4 U21.4 | length 53.3
  Top Layer w0.127: R65.1@81.954,172.212 81.888,172.278 81.888,176.508 v3(82.22,176.84) ; v3(93.52,174.3) 94.16,174.94 117.56,174.94 118.364,175.744 SW2.1@118.364,183.896
  Bottom Layer w0.127: v3(82.22,176.84) 84.76,174.3 v3(93.52,174.3) ; R86.1@117.182,181.864 118.364,183.046 SW2.1@118.364,183.896
DQ0: R184.1 U16.2 | length 7.4
  Top Layer w0.127: v1(120.56,103.24) U16.2@122.562,103.24
  Bottom Layer w0.127: R184.1@120.396,108.204 120.396,107.784 120.986,107.194 120.986,103.666 v1(120.56,103.24)
DQ1: R184.2 U16.5 | length 5.6
  Top Layer w0.127: v1(120.42,105.64) U16.5@122.562,105.64
  Bottom Layer w0.127: R184.2@119.596,108.204 119.596,107.644 119.9,107.34 120.481,107.34 120.732,107.089 120.732,105.952 v1(120.42,105.64)
DQ2: R184.3 U16.8 | length 5.4
  Top Layer w0.127: v1(120.2,106.8) 121.44,108.04 U16.8@122.562,108.04
  Bottom Layer w0.127: R184.3@118.796,108.204 118.796,107.324 119.32,106.8 v1(120.2,106.8)
DQ3: R184.4 U16.11 | length 7.5
  Top Layer w0.127: v1(120.72,110.92) 121.2,110.44 U16.11@122.562,110.44
  Bottom Layer w0.127: R184.4@117.996,108.204 117.996,108.836 118.14,108.98 120.7,108.98 120.9,109.18 120.9,110.7 v1(120.72,110.92)
DQ4: R185.1 U16.44 | length 6.7
  Top Layer w0.127: U16.44@111.462,110.44 v1(112.86,110.44)
  Bottom Layer w0.127: v1(112.86,110.44) 112.86,109.48 113.3,109.04 116.1,109.04 116.332,108.808 R185.1@116.332,108.204
DQ5: R185.2 U16.47 | length 5.9
  Top Layer w0.127: U16.47@111.462,108.04 112.06,108.04 v1(113.78,106.32)
  Bottom Layer w0.127: v1(113.78,106.32) 114.22,106.32 115.532,107.632 R185.2@115.532,108.204
DQ6: R185.3 U16.50 | length 5.1
  Top Layer w0.127: U16.50@111.462,105.64 v1(113.06,105.64)
  Bottom Layer w0.127: v1(113.06,105.64) 113.06,106.46 113.46,106.86 113.82,106.86 114.732,107.772 R185.3@114.732,108.204
DQ7: R185.4 U16.53 | length 7.2
  Top Layer w0.127: U16.53@111.462,103.24 v3(112.76,103.24)
  Bottom Layer w0.127: v3(112.76,103.24) 112.76,103.74 112.52,103.98 112.52,106.54 113.14,107.16 113.6,107.16 113.932,107.492 R185.4@113.932,108.204
DQ8: R186.1 U14.2 | length 7.6
  Top Layer w0.127: v1(104.44,103.24) U14.2@106.306,103.24
  Bottom Layer w0.127: R186.1@104.14,108.204 104.14,108.2 104.82,107.52 104.82,105.24 104.02,104.44 104.02,103.66 v1(104.44,103.24)
DQ9: R186.2 U14.5 | length 5.7
  Top Layer w0.127: v1(104.22,105.62) 104.24,105.64 U14.5@106.306,105.64
  Bottom Layer w0.127: R186.2@103.34,108.204 103.34,107.54 103.46,107.42 104.22,107.42 104.52,107.12 104.52,105.94 v1@104.22,105.64
DQ10: R186.3 U14.8 | length 5.2
  Top Layer w0.127: v1(103.92,106.86) 103.96,106.86 105.14,108.04 U14.8@106.306,108.04
  Bottom Layer w0.127: R186.3@102.54,108.204 102.54,107.54 103.22,106.86 v1(103.92,106.86)
DQ11: R186.4 U14.11 | length 6.5
  Top Layer w0.127: v1(104.92,110.42) 104.94,110.44 U14.11@106.306,110.44
  Bottom Layer w0.127: R186.4@101.74,108.204 101.74,108.86 101.92,109.04 104.62,109.04 104.92,109.34 v1(104.92,110.42)
DQ12: R187.1 U14.44 | length 6.4
  Top Layer w0.127: U14.44@95.206,110.44 96.38,110.44 v1(96.64,110.18)
  Bottom Layer w0.127: v1(96.64,110.18) 96.64,109.66 97.26,109.04 99.82,109.04 100.076,108.784 R187.1@100.076,108.204
DQ13: R187.2 U14.47 | length 5.9
  Top Layer w0.127: U14.47@95.206,108.04 96.4,108.04 v1(97.8,106.64)
  Bottom Layer w0.127: v1(97.8,106.64) 98.66,106.64 99.276,107.256 R187.2@99.276,108.204
DQ14: R187.3 U14.50 | length 5.7
  Top Layer w0.127: U14.50@95.206,105.64 v1(97.5,105.64)
  Bottom Layer w0.127: v1(97.5,105.64) 97.24,105.9 97.24,106.86 97.54,107.16 97.92,107.16 98.476,107.716 R187.3@98.476,108.204
DQ15: R187.4 U14.53 | length 6.9
  Top Layer w0.127: U14.53@95.206,103.24 v1(96.6,103.24)
  Bottom Layer w0.127: v1(96.6,103.24) 96.96,103.58 96.96,107.1 97.3,107.44 97.5,107.44 97.676,107.616 R187.4@97.676,108.204
DS0: R175.8 U18.34 U33.40 | length 87.3
  Top Layer w0.127: U33.40@50.78,123.487 50.78,122.52 51.008,122.292 51.008,119.452 52.042,118.418 v3(52.042,116.021) ; v3(62.58,97.12) 62.896,97.436 87.394,97.436 90.15,94.68 111.419,94.68 113.767,97.028 R175.8@116.156,97.028
  Bottom Layer w0.127: v3(52.042,116.021) 52.042,115.64 53.3,114.382 53.3,111.74 54.66,110.38 54.66,109.18 55.026,108.814 55.026,107.174 55.49,106.71 55.89,106.71 62.58,100.02 v3(62.58,97.12)
DS1: R175.7 U18.36 U33.41 | length 88.8
  Top Layer w0.127: U33.41@50.28,123.487 50.28,122.5 50.74,122.04 50.74,119.198 51.32,118.618 51.32,116.299 v3(50.988,115.967) ; v3@61.442,97.62 v3(61.44,97.38) 61.576,97.38 61.886,97.69 87.523,97.69 90.273,94.94 111.32,94.94 114.208,97.828 R175.7@116.156,97.828
  Bottom Layer w0.127: v3@50.988,115.941 50.988,115.892 52.788,114.092 52.788,111.132 53.928,109.992 53.928,109.132 54.026,109.034 54.026,107.174 54.998,106.202 55.62,106.202 60.643,101.179 61.44,100.382 v3(61.44,97.38)
DS2: R175.6 U18.39 U33.44 | length 90.2
  Top Layer w0.127: U33.44@48.78,123.487 48.78,122.58 48.64,122.44 48.64,120.938 50.74,118.838 50.74,117.6 51.048,117.292 51.048,116.688 50.811,116.451 50.631,116.451 50.451,116.271 50.451,115.311 v3(50.902,114.861) ; v3(60.36,97.88) 60.424,97.944 87.628,97.944 90.372,95.2 111.179,95.2 114.607,98.628 R175.6@116.156,98.628
  Bottom Layer w0.127: v3(50.902,114.861) 50.939,114.861 52.28,113.52 52.28,109.44 52.526,109.194 52.526,107.374 54.206,105.694 55.326,105.694 60.36,100.66 v3(60.36,97.88)
DS3: R175.5 U18.41 U33.45 | length 91.5
  Top Layer w0.127: U33.45@48.28,123.487 48.28,120.939 50.102,119.118 v3(50.102,118.041) ; v3(59.32,98.42) 61.192,98.42 61.414,98.198 87.754,98.198 90.492,95.46 111.08,95.46 115.048,99.428 R175.5@116.156,99.428
  Bottom Layer w0.127: v3(50.102,118.041) 49.681,117.62 49.32,117.62 49.08,117.38 49.08,116.8 49.36,116.52 49.8,116.52 50.132,116.188 50.132,113.828 51.526,112.434 51.526,107.294 53.634,105.186 55.114,105.186 59.32,100.98 v3(59.32,98.42)
DS4: R176.8 U18.47 U33.46 | length 87.8
  Top Layer w0.127: U33.46@47.78,123.487 47.78,121.08 49.62,119.24 49.62,118.519 v3(49.262,118.161) ; v3(57.92,99.24) 59.026,99.24 59.274,98.992 60.014,98.992 60.294,98.712 61.288,98.712 61.548,98.452 87.954,98.452 90.666,95.74 103.138,95.74 105.442,98.044 R176.8@110.568,98.044
  Bottom Layer w0.127: v3(49.262,118.161) 49.262,118.102 48.8,117.64 48.8,115.96 49.305,115.455 49.422,115.455 49.624,115.254 49.624,110.224 48.526,109.126 48.526,106.958 50.806,104.678 54.842,104.678 58.26,101.26 58.26,99.58 v3(57.92,99.24)
DS5: R176.7 U18.49 U33.47 | length 88.7
  Top Layer w0.127: U33.47@47.28,123.487 47.28,121.079 49.102,119.258 v3(49.102,119.021) ; v3(56.786,99.766) 58.154,99.766 58.374,99.546 59.094,99.546 59.394,99.246 60.134,99.246 60.414,98.966 61.394,98.966 61.654,98.706 88.134,98.706 90.84,96 103.039,96 105.883,98.844 R176.7@110.568,98.844
  Bottom Layer w0.127: v3(49.102,119.021) 49.102,118.873 48.811,118.583 48.811,118.411 48.536,118.136 48.536,114.767 49.102,114.201 49.102,110.479 49.109,110.471 49.109,110.469 47.526,108.886 47.526,107.024 50.38,104.17 54.57,104.17 57.16,101.58 57.16,100.14 v3(56.786,99.766)
DS6: R176.6 U18.51 U33.48 | length 88.9
  Top Layer w0.127: U33.48@46.78,123.487 46.78,121.22 48.44,119.56 48.44,118.799 v3(48.302,118.661) ; v3(55.96,100.2) 56.02,100.2 56.106,100.286 57.055,100.286 57.321,100.02 58.261,100.02 58.481,99.8 59.221,99.8 59.521,99.5 60.241,99.5 60.521,99.22 61.501,99.22 61.761,98.96 88.251,98.96 90.951,96.26 102.94,96.26 106.324,99.644 R176.6@110.568,99.644
  Bottom Layer w0.127: v3(48.302,118.661) 48.28,118.639 48.28,114.691 48.02,114.431 48.02,113.08 47.5,112.56 47.5,110.961 46.526,109.987 46.526,107.116 49.98,103.662 54.238,103.662 55.96,101.94 v3(55.96,100.2)
DS7: R176.5 U18.53 U33.49 | length 90.5
  Top Layer w0.127: U33.49@44.93,121.637 45.826,121.637 47.862,119.601 v3(47.862,119.401) ; v3(54.84,100.74) 56.16,100.74 56.36,100.54 57.16,100.54 57.42,100.28 58.36,100.28 58.58,100.06 59.32,100.06 59.62,99.76 60.34,99.76 60.62,99.48 61.6,99.48 61.86,99.22 88.35,99.22 91.05,96.52 102.84,96.52 106.764,100.444 R176.5@110.568,100.444
  Bottom Layer w0.127: 45.526,107.117 U18.53@45.526,108.073 ; v3(47.862,119.401) 47.862,118.929 47.396,118.463 47.396,116.224 47.236,116.064 47.236,115.644 47.66,115.22 47.66,114.79 47.502,114.632 47.502,113.552 46.822,112.872 46.822,111.002 45.526,109.706 45.526,107.068 49.44,103.154 53.826,103.154 54.86,102.12 v3@54.86,100.72
DS8: R188.8 U18.35 U33.50 | length 69.8
  Top Layer w0.127: U33.50@44.93,121.137 45.943,121.137 47.332,119.748 47.332,118.827 48.559,117.6 49.665,117.6 49.694,117.571 49.889,117.571 50.499,116.961 v3(50.522,116.961) ; v3(62.02,99.8) 62.024,99.8 62.306,100.082 89.06,100.082 92.362,96.78 98.44,96.78 98.688,97.028 R188.8@99.9,97.028
  Bottom Layer w0.127: v3(50.522,116.961) 50.859,116.961 51.52,116.3 51.52,115.802 53.042,114.281 53.042,111.378 54.34,110.08 54.34,109.141 54.526,108.955 54.526,107.034 55.104,106.456 55.764,106.456 62.02,100.2 v3(62.02,99.8)
DS9: R188.7 U18.37 U33.51 | length 69.9
  Top Layer w0.127: U33.51@44.93,120.637 45.743,120.637 47.078,119.302 47.078,118.722 48.739,117.061 v3(49.622,117.061) ; v3(60.88,100) 60.89,100 61.226,100.336 89.166,100.336 92.462,97.04 97.92,97.04 98.708,97.828 R188.7@99.9,97.828
  Bottom Layer w0.127: v3(49.622,117.061) 50.386,116.297 50.386,115.626 50.592,115.42 51.101,115.42 52.534,113.987 52.534,111.026 53.58,109.98 53.58,109.24 53.526,109.186 53.526,107.034 54.612,105.948 55.432,105.948 60.139,101.241 ; 60.139,101.241 60.88,100.5 v3(60.88,100)
DS10: R188.6 U18.40 U33.52 | length 70
  Top Layer w0.127: U33.52@44.93,120.137 45.863,120.137 46.824,119.176 46.824,118.617 48.921,116.52 49.82,116.52 50.14,116.2 50.14,114.56 50.639,114.061 v3(50.662,114.061) ; v3(59.84,100.28) 59.856,100.28 60.166,100.59 89.271,100.59 92.561,97.3 97.4,97.3 98.728,98.628 R188.6@99.9,98.628
  Bottom Layer w0.127: v3(50.662,114.061) 51.9,112.822 51.9,109.24 52.026,109.114 52.026,107.254 53.84,105.44 55.22,105.44 59.84,100.82 v3(59.84,100.28)
DS11: R188.5 U18.42 U33.53 | length 69.9
  Top Layer w0.127: U33.53@44.93,119.637 45.863,119.637 46.57,118.93 46.57,118.512 49.081,116.001 v3(49.542,116.001) ; v3(58.8,100.58) 58.82,100.58 59.084,100.844 89.376,100.844 92.66,97.56 96.96,97.56 98.828,99.428 R188.5@99.9,99.428
  Bottom Layer w0.127: v3(49.542,116.001) 49.878,115.665 49.878,113.723 51.026,112.575 51.026,107.194 53.288,104.932 54.968,104.932 58.8,101.1 v3(58.8,100.58)
DS12: R189.8 U18.48 U33.54 | length 65.7
  Top Layer w0.127: U33.54@44.93,119.137 45.883,119.137 46.316,118.704 46.316,118.407 49.062,115.661 v3(49.062,115.001) ; v3(57.72,100.8) 57.734,100.8 58.032,101.098 90.022,101.098 93.076,98.044 R189.8@94.312,98.044
  Bottom Layer w0.127: v3(49.062,115.001) 49.37,114.693 49.37,110.37 48.026,109.027 48.026,106.964 50.566,104.424 54.716,104.424 57.72,101.42 v3(57.72,100.8)
DS13: R189.7 U18.50 U33.55 | length 65.8
  Top Layer w0.127: U33.55@44.93,118.637 45.803,118.637 46.02,118.42 46.02,118.343 48.542,115.821 v3(48.542,114.001) ; v3(56.6,101.06) 56.854,101.06 57.146,101.352 90.648,101.352 93.156,98.844 R189.7@94.312,98.844
  Bottom Layer w0.127: v3(48.542,114.001) 48.848,113.695 48.848,110.588 47.026,108.766 47.026,107.13 50.24,103.916 54.444,103.916 56.6,101.76 v3(56.6,101.06)
DS14: R189.6 U18.52 U33.56 | length 65.7
  Top Layer w0.127: U33.56@44.93,118.137 45.763,118.137 46.009,117.891 46.112,117.891 47.762,116.241 v3(47.762,115.861) ; v3(55.4,101.34) 55.94,101.34 56.206,101.606 91.226,101.606 93.188,99.644 R189.6@94.312,99.644
  Bottom Layer w0.127: v3(47.762,115.861) 48.02,115.602 48.02,114.791 47.766,114.537 47.766,113.457 47.085,112.776 47.085,110.906 46.026,109.846 46.026,107.102 49.72,103.408 54.052,103.408 55.4,102.06 v3(55.4,101.34)
DS15: R189.5 U18.54 U33.57 | length 65.1
  Top Layer w0.127: U33.57@44.93,117.637 46.006,117.637 47.142,116.501 v3(47.142,115.001) ; v3(54.32,101.76) 54.88,101.76 54.98,101.86 91.76,101.86 93.176,100.444 R189.5@94.312,100.444
  Bottom Layer w0.127: v3(47.142,115.001) 47.142,113.551 46.568,112.977 46.568,111.107 45.026,109.565 45.026,107.094 49.28,102.84 53.24,102.84 v3(54.32,101.76)
EECLK: P2.1 R15.1 U2.W14 | length 43.5
  Top Layer w0.127: U2.W14@111.76,148.082 111.802,148.082 112.36,148.64 113.28,148.64 114.6,147.32 127.24,147.32 128.14,148.22 129.6,148.22 130.68,149.3 142.76,149.3 145.58,152.12 145.58,154.796 P2.1@146.708,155.924 146.874,155.758 R15.1@149.248,155.758
EEDAT: P2.3 R16.1 U2.Y15 | length 41.7
  Top Layer w0.127: U2.Y15@113.03,149.352 113.03,149.35 114.806,147.574 127.135,147.574 128.041,148.48 129.501,148.48 130.581,149.56 142.661,149.56 145.2,152.099 145.2,154.892 143.826,156.266 R16.1@143.826,158.464
EGPIO0: R35.2 U2.E18 U8.7 | length 102.6
  Top Layer w0.127: v1(93.34,153.8) 93.978,153.162 U2.E18@93.98,153.162 ; v1(119.44,159.7) 119.44,160.101 123.999,164.66 v3(125,164.66) ; v3(127.52,169.7) 129.96,169.7 133.262,173.002 133.262,175.262 135.22,177.22 162.62,177.22 164.88,179.48 164.88,181.6 165.128,181.848 U8.7@173.736,181.848
  Bottom Layer w0.127: v1(93.34,153.8) 93.34,154.888 95.598,157.146 95.598,159.658 98.62,162.68 116.46,162.68 v1(119.44,159.7) ; v3(125,164.66) 125,165.8 124.72,166.08 124.72,167.94 126.48,169.7 v3(127.52,169.7)
EGPIO5: P2.7 R25.2 U2.E20 | length 60.3
  Top Layer w0.127: v1(93.78,158.82) 93.98,158.62 U2.E20@93.98,155.702 ; v1(120.54,160.46) 132.06,160.46 v3(132.44,160.82) ; R25.2@139.026,150.876 139.076,150.876 140.36,152.16 140.36,154.652 P2.7@139.088,155.924
  Bottom Layer w0.127: v1(93.78,158.82) 93.78,159.34 97.9,163.46 117.54,163.46 v1(120.54,160.46) ; v3(132.44,160.82) 135.5,157.76 136.54,157.76 138.376,155.924 P2.7@139.088,155.924
FOUTA: C163.2 J8.1 R129.1 R132.2 | length 13.1
  Top Layer w0.2: R129.1@10.668,147.486 R129.1@10.834,147.32
  Top Layer w0.25: C163.2@10.668,157.096 10.668,154.212 11.86,153.02 11.86,151.142 J8.1@10.668,149.95 10.668,147.486 R129.1@10.834,147.32 R132.2@10.834,145.288
FOUTB: C164.2 J8.2 R130.1 R131.2 | length 18.8
  Top Layer w0.2: J8.2@17.468,149.95 18.036,149.95 R131.2@19.812,151.726 R130.1@19.812,153.582
  Top Layer w0.25: C164.2@13.208,157.096 14.46,155.844 14.46,152.958 J8.2@17.468,149.95 18.036,149.95 R131.2@19.812,151.726 R130.1@19.812,153.582
FPDI_CFG1: J14.38 R145.2 S2.6 | length 25.7
  Top Layer w0.127: v3(148.14,103.68) 148.14,102.02 149.225,100.935 S2.6@149.225,99.623 ; v3(152.14,106.46) 152.14,106.9 152.306,107.066 153.126,107.066 154.726,108.666 156.066,108.666 156.98,109.58 156.98,112.26 158.14,113.42 158.58,113.42 159.6,114.44 v3(160.56,114.44)
  Bottom Layer w0.127: v3(148.14,103.68) 148.26,104.252 149.352,105.344 R145.2@149.352,105.83 149.91,105.83 150.18,106.1 151.78,106.1 v3(152.14,106.46) ; v3(160.56,114.44) 162.532,114.44 J14.38@162.536,114.436
FPDI_CFG2: J14.41 R146.2 S2.5 | length 21.9
  Top Layer w0.127: v3(147.6,104.54) 147.6,101.96 147.955,101.605 S2.5@147.955,99.623 ; v3(151.28,106.66) 151.28,106.72 151.88,107.32 152.86,107.32 154.46,108.92 155.92,108.92 156.66,109.66 v3(156.66,112.92)
  Bottom Layer w0.127: v3(147.6,104.54) 147.828,104.768 147.828,106.408 148.08,106.66 v3(151.28,106.66) ; v3(156.66,112.92) 158.02,112.92 J14.41@158.036,112.936
FPDI_DE: J14.37 S2.7 S2.8 | length 29.9
  Top Layer w0.127: v3(148.9,103.98) 151.765,101.115 S2.8@151.765,99.623 ; S2.7@150.495,99.623 150.495,102.385 ; v3@152.82,105.8 152.82,106.08 154.2,107.46 154.2,107.781 154.831,108.412 156.292,108.412 157.5,109.62 157.5,110.36 161.26,114.12 161.26,114.8 160.98,115.08 159.86,115.08 159.72,114.94 v3(159.36,114.94)
  Bottom Layer w0.127: v3(148.9,103.98) 149.14,103.92 150.62,105.4 150.62,105.58 150.82,105.78 v3(152.8,105.78) v3@152.82,105.8 ; J14.37@158.036,114.936 159.356,114.936 v3(159.36,114.94)